# Altium PCB Monitor_Board_Model_H201.PcbDoc (part 5 of 5)
Units mm, origin at the board's own origin, x right, y up, seen from the top; angles counter-clockwise.
Board outline 50 x 40 mm, 6 copper layers (1-SIG-TOP, 2-GND, 3-PWR, 4-SIG-HOR, 5-SIG-VERT, 6-GND-BOT), stack 1.17 mm thick; 210 components, 140 nets, 699 pads, 51 vias.
Unrouted connection lines stored in the file: 491.
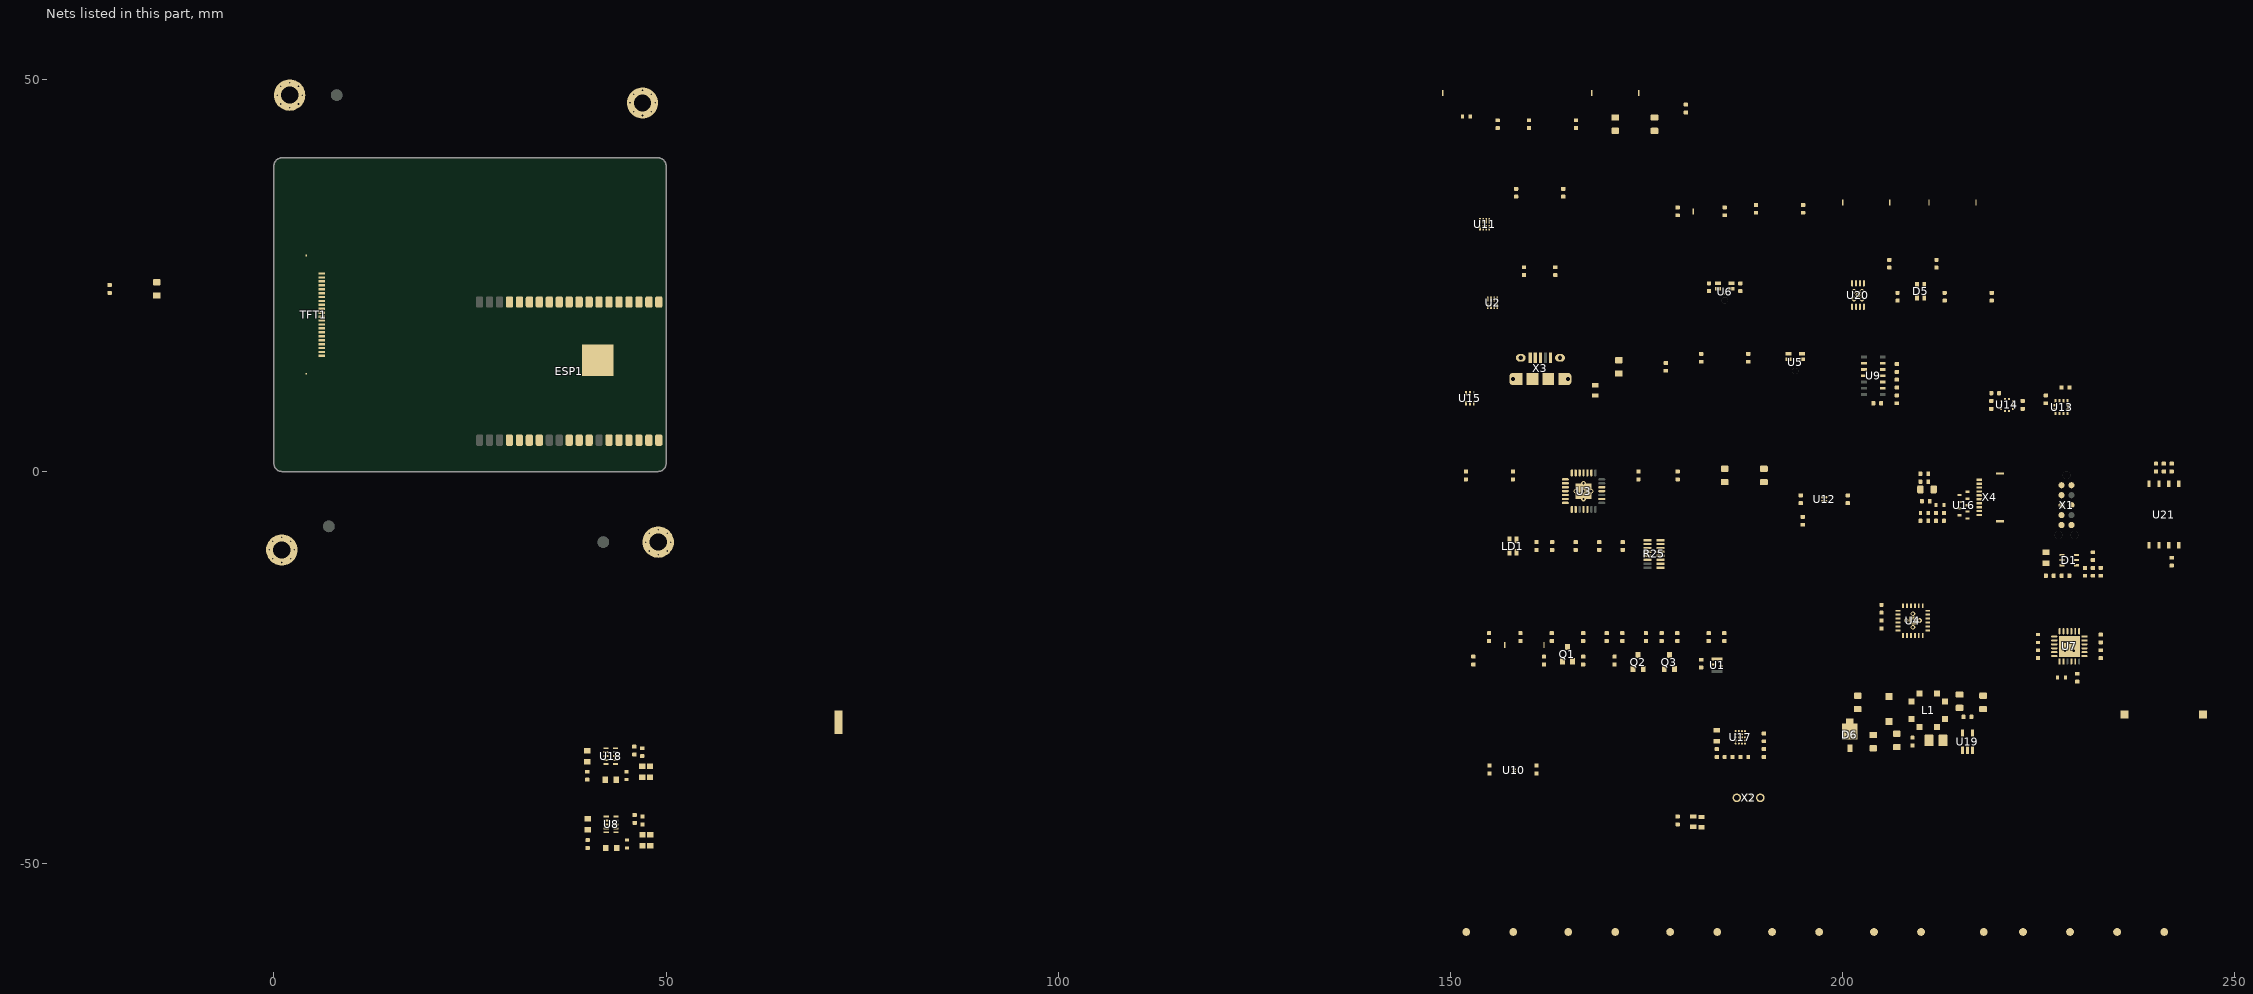
[diagram p7: the nets of this part, all layers, seen from the top]

## Via types
v1: diameter 0.55, hole 0.2, 1-SIG-TOP to 6-GND-BOT, 32 vias
v2: diameter 0.605, hole 0.3, 1-SIG-TOP to 6-GND-BOT, tented both sides, 15 vias
v3: diameter 0.6, hole 0.3, 1-SIG-TOP to 6-GND-BOT, tented both sides, 4 vias

## Nets (pads, with @x,y where several pads share a name; then routed paths per layer and width w, separated by ;. In a path a pad name is that pad's centre, name@x,y a point inside that pad or via, vN(x,y) a via of type N, cw(c..) or ccw(c..) an arc to the next point about the centre after c; other vN are vias at no path point)
1V8_HRM_PS: C29.1 C30.1 C33.2 C34.1 NT10.2 R37.2 R38.2 R39.1 U9.11 U10.A2 U11.1 U12.B2
1V8_VDD: C49.2 R40.2 U17.D1
3V3_ESP32: C2.2 C4.2 C5.2 C6.2 C9.2 C14.1 C15.1 C16.2 C17.2 C18.2 C47.1 C52.2 C53.1 C54.1 ESP1.2 NT3.1 R7.2 R8.2 R16.1 R50.2 TP5.1 U1.4 U2.8 U4.21 U5.2 U6.2 U7.7 U7.8 U17.E1 U17.E4 U18.5 U18.6 U18.7
+3V3: C7.2 C8.1 C32.2 C35.2 C36.1 C38.2 C39.1 C40.2 C48.1 C60.1 C61.1 C62.2 C63.2 C64.2 FB1.1 NT2.2 NT6.1 NT8.2 R13.2 R14.2 R58.1 R59.1 R60.1 TFT1.3 TFT1.4 TFT1.6 TP6.1 U2.1 U10.A1 U11.8 U12.A2 U13.3 U13.7 U14.1 U17.D4 U20.8 U21.8 X1.1
\CP2102_RST: R24.1 U3.9
\ESP32_RST: C3.2 ESP1.3 R15.1 R16.2
\MR: U16.5 U17.C1 X4.8
\RESET: Q1.3 R1.2 R15.2 R21.2 U4.24
\RST: R1.1
\SUSP_B: R29.1 U3.11
A0: NT1.2 U4.18 U4.23
ADCIN: C44.2 R40.1 R41.1 R42.1 R43.1 R44.1 R45.1 R46.1 R47.1 U17.C4
DCD: R25.3 U3.1
DIO_0: U4.1 U10.B1
DIO_1: R61.2 U4.2
DIO_2: U4.3 U9.13
DIO_3: R62.2 U4.4
DIO_4: U4.5 U14.7
DIO_5: U4.6 U13.5
DIO_6: U4.7 U17.C2
DIO_7: U4.8 U17.D3
DIO_8: TFT1.20 U4.10
DIO_9: R34.1 U4.11 U8.3
DIO_10: U4.12 U7.9
DIO_11: U4.13 U7.18
DIO_12: R9.1 U4.14
DIO_13: R10.1 U4.15
DIO_14: R11.1 U4.16
DIO_15: R12.1 U4.17
DISP.TE: TFT1.19
DSR: R25.6 U3.27
DTR: Q2.2 Q3.2 R2.1 U3.28
GND: C1.2 C2.1 C3.1 C4.1 C5.1 C6.1 C7.1 C8.2 C9.1 C10.1 C11.1 C12.1 C13.1 C14.2 C15.2 C16.1 C17.1 C18.1 C19.1 C20.1 C21.1 C22.1 C23.2 C24.2 C26.2 C27.2 C28.1 C29.2 C30.2 C31.1 C32.1 C33.1 C34.2 C35.1 C36.2 C37.2 C38.1 C39.2 C40.1 C41.2 C42.1 C43.1 C44.1 C45.1 C46.2 C47.2 C48.2 C49.1 C50.2 C51.2 C53.2 C54.2 C55.1 C56.2 C58.1 C59.2 C60.2 C61.2 C62.1 C63.1 C64.1 D1.2 D2.2 D3.2 D4.2 ESP1.1 ESP1.15 ESP1.38 ESP1.39 J1.1 L1.1 MNT1.1 MNT2.1 MNT3.1 MNT4.1 NT1.1 NT4.1 NT5.1 NT7.2 NT9.2 R9.2 R10.2 R11.2 R12.2 R22.1 R26.1 R33.2 R34.2 R36.2 R39.2 R48.1 R49.2 R51.2 R55.1 R61.1 R62.1 TFT1.5 TFT1.7 TFT1.8 TFT1.9 TFT1.10 TFT1.11 TFT1.12 TFT1.13 TFT1.14 TFT1.15 TFT1.22 TFT1.23 TFT1.24 TP9.1 TP10.1 TP11.1 TP12.1 TP13.1 TP14.1 TP15.1 U1.2 U2.4 U3.3 U3.29 U4.9 U4.EP U5.5 U6.5 U7.24 U7.25 U8.9 U8.10 U9.4 U9.12 U10.B2 U11.4 U12.B1 U13.4 U13.8 U13.9 U14.3 U14.8 U14.9 U15.3 U16.3 U17.A4 U17.C3 U18.9 U18.10 U19.2 U20.5 U20.9 U21.4 X1.3 X2.3 X3.5 X3.6 X4.9 X4.10 X4.S1 X4.S2
  other v1: 1,-11.6 -0.131,-11.131 2.131,-11.131 49,-10.6 47.869,-10.131 50.131,-10.131 -0.6,-10 2.6,-10 47.4,-9 50.6,-9 -0.131,-8.869 2.131,-8.869 1,-8.4 47.869,-7.869 50.131,-7.869 49,-7.4 47,45.4 45.869,45.869 48.131,45.869 2,46.4 0.869,46.869 3.131,46.869 45.4,47 48.6,47 0.4,48 3.6,48 45.869,48.131 48.131,48.131 47,48.6 0.869,49.131 3.131,49.131 2,49.6
  other v2: 209,-19.85 208.15,-19 209,-19 209.85,-19 209,-18.15 167,-3.5 166,-2.5 167,-2.5 168,-2.5 167,-1.5 201.5,22 202.5,22 202,22.5 201.5,23 202.5,23
  other v3: 228.405,-22.84 229.505,-22.84 228.405,-21.74 229.505,-21.74
GPIO0: ESP1.25 R5.1 U7.12
GPIO1: ESP1.35 R25.4 U3.25
GPIO2: ESP1.24 R6.1 R7.1 TP3.1 U2.7 U4.19 U17.E3
GPIO3: ESP1.34 R26.2 U3.26
GPIO4: ESP1.26 R8.1 TP4.1 U2.6 U4.20 U17.E2
GPIO5: ESP1.29 R58.2 U21.1
GPIO12: ESP1.14 R20.2
GPIO13: ESP1.16 R18.2
GPIO14: ESP1.13 R17.2
GPIO15: ESP1.23 R19.2
GPIO18: ESP1.30 TFT1.17 U21.6
GPIO19: ESP1.31 U21.2
GPIO21: ESP1.33 U7.16
GPIO22: ESP1.36 U7.13
GPIO23: ESP1.37 R57.1 U21.5
GPIO25: ESP1.10 TFT1.18
GPIO26: ESP1.11 TFT1.16
GPIO27: ESP1.12 U7.14
GPIO32: C1.1 ESP1.8
GPIO33: ESP1.9 U1.3
GPIO34: ESP1.6 U17.D2
GPIO35: ESP1.7 U17.B1
GPIO36: ESP1.4 U7.15
GPIO39: ESP1.5 U4.22
I2C.SCL: R13.1 TP1.1 U2.2 U7.19 U11.7 U13.12 U14.2 U20.6
I2C.SDA: R14.1 TP2.1 U2.3 U7.20 U11.6 U13.2 U14.4 U20.7
KEY_1: R41.2 U16.1 X4.1
KEY_2: R42.2 U16.9 X4.2
KEY_3: R43.2 U16.2 X4.3
KEY_4: R44.2 U16.8 X4.4
KEY_5: R45.2 U16.7 X4.5
KEY_6: R46.2 U16.4 X4.6
KEY_7: R47.2 U16.6 X4.7
LCD_BL_A: C58.2 C59.1 D6.1 D7.1 R56.1 TFT1.1
LCD_BL_K: D7.2 R55.2 R56.2 TFT1.2 U19.3
LCD_BL_PWM: U19.4 U20.4
LR_SEL1: NT3.2 U5.4
LR_SEL2: NT4.2 U6.4
MICCLK: R30.2 U7.10
MICDO: R31.1 R32.1 U7.11
NetC19_2: C19.2 R33.1 U7.5
NetC20_2: C20.2 C22.2 U7.4
NetC25_1: C25.1 R35.1 R36.1 U8.8
NetC28_2: C28.2 C31.2 C37.1 U9.9 U9.10 U12.A1
NetC41_1: C41.1 FB1.2 U14.10
NetC52_1: C52.1 R50.1 R51.1 U18.8
NetC55_2: C55.2 C56.1 FB2.2 L1.4 U19.5
NetC57_1: C57.1 L1.3 U19.1
NetC57_2: C57.2 D6.2 L1.2
NetD1_1: D1.1 R18.1 X1.4
NetD1_3: D1.3 R17.1 X1.2
NetD1_4: D1.4 R21.1 X1.10
NetD1_5: D1.5 R20.1 X1.8
NetD1_6: D1.6 R19.1 X1.6
NetD2_1: D2.1 U17.A3 U17.B3 X2.1
NetD3_1: D3.1 R48.2 U17.B4 X2.2
NetD5_BK: D5.BK R52.2
NetD5_GK: D5.GK R53.2
NetD5_RK: D5.RK R54.2
NetJ1_2: J1.2 X1.5
NetLD1_BK: LD1.BK R29.2
NetLD1_GK: LD1.GK R28.2
NetLD1_RK: LD1.RK R27.2
NetNT2_1: NT2.1 U2.5
NetNT5_2: NT5.2 U7.17 U7.21 U7.22
NetNT6_2: NT6.2 U14.6
NetNT7_1: NT7.1 U14.5
NetNT8_1: NT8.1 U13.11
NetNT9_1: NT9.1 U13.1
NetNT10_1: NT10.1 U11.5
NetNT11_1: NT11.1 R49.1 U18.3
NetQ1_1: Q1.1 R2.2
NetQ2_1: Q2.1 R3.2
NetQ2_3: Q2.3 R5.2
NetQ3_1: Q3.1 R4.2
NetQ3_3: Q3.3 R6.2
NetR22_2: R22.2 R23.2 U3.8
NetR30_1: R30.1 U5.3 U6.3
NetR31_2: R31.2 U5.1
NetR32_2: R32.2 U6.1
NetR37_1: R37.1 U9.3 U11.3
NetR38_1: R38.1 U9.2 U11.2
NetR52_1: R52.1 U20.1
NetR53_1: R53.1 U20.2
NetR54_1: R54.1 U20.3
NetR57_2: R57.2 TFT1.21
NetU7_1: U7.1 Y1.M
NetU7_23: U7.23 Y1.P
NetU13_6: U13.6
NetU13_10: U13.10
QSPI.IO2/WP: R59.2 U21.3
QSPI.IO3/HD: R60.2 U21.7
RI/CLK: R25.2 U3.2
RXT: R28.1 U3.18
SUSP: U3.12
TXT: R27.1 U3.19
UART0.CTS: R25.5 U3.23
UART0.RTS: Q1.2 R3.1 R4.1 U3.24
USB.D_N: U3.5 U15.2
USB.D_P: U3.4 U15.1
USB_CONN_N: U15.5 X3.2
USB_CONN_P: U15.6 X3.3
VBUS: C12.2 C13.2 C42.2 C43.2 C45.2 D4.1 LD1.A R23.1 TP8.1 U3.7 U17.A1 X3.1
VDD: C10.2 C11.2 R24.2 R25.9 R25.10 R25.11 R25.12 R25.13 R25.14 R25.15 R25.16 U3.6
VDD_PA: C21.2 C25.2 C26.1 C27.1 R35.2 U7.2 U8.5 U8.6 U8.7
VSYS: C23.1 C24.1 C46.1 C50.1 C51.1 D5.A FB2.1 NT11.2 TP7.1 U8.1 U8.2 U17.A2 U17.B2 U18.1 U18.2
WKUP: R25.1 U3.16
pads on no net: ESP1.17 ESP1.18 ESP1.19 ESP1.20 ESP1.21 ESP1.22 ESP1.27 ESP1.28 ESP1.32 FID1. FID2. FID3. R25.7 R25.8 U1.1 U3.10 U3.13 U3.14 U3.15 U3.17 U3.20 U3.21 U3.22 U5. U6. U7.3 U7.6 U8.4 U9.1 U9.5 U9.6 U9.7 U9.8 U9.14 U15.4 U18.4 X1.0 X1.7 X1.9 X3.4

## Polygon pours and split planes (outlines as drawn)
GND on 1-SIG-TOP "NONET_L01_P112" (solid, shelved, pour order 112): -25,53 75,53 75,-17 -25,-17
no net on 1-SIG-TOP "NONET_L01_P110" (solid, shelved, pour order 110): -0.616,-9.126 4.337,-9.126 4.337,-12.301 -0.616,-12.301
no net on 1-SIG-TOP "NONET_L01_P108" (solid, shelved, pour order 108): 3.575,-4.3 6.115,-4.3 6.115,2.431 6.75,2.431 6.75,5.86 4.464,5.86 4.464,8.4 -0.87,8.4 -0.87,-1.76 3.575,-1.76
VBUS on 1-SIG-TOP "NONET_L01_P107" (solid, shelved, pour order 107): -20.555,-4.046 -17.126,-4.046 -17.126,-6.459 -18.904,-6.459 -18.904,-6.713 -20.555,-6.713
no net on 1-SIG-TOP "NONET_L01_P106" (solid, shelved, pour order 106): -14.459,-7.983 -12.935,-7.983 -12.935,-9.507 -9.76,-9.507 -9.76,-13.317 -13.824,-13.317 -13.824,-8.872 -14.459,-8.872
VSYS on 1-SIG-TOP "NONET_L01_P105" (solid, shelved, pour order 105): 13.227,-6.586 13.227,-10.65 11.195,-10.65 11.195,-6.586
VSYS on 1-SIG-TOP "NONET_L01_P104" (solid, shelved, pour order 104): 5.607,18.56 5.607,16.02 1.035,16.02 1.035,18.56
VSYS on 1-SIG-TOP "NONET_L01_P103" (solid, shelved, pour order 103): 60.09,17.29 62.63,17.29 62.63,15.385 60.09,15.385
VSYS on 1-SIG-TOP "NONET_L01_P102" (solid, shelved, pour order 102): -14.459,-6.967 -10.395,-6.967 -10.395,-3.03 -7.982,-3.03 -7.982,-10.015 -9.76,-10.015 -9.76,-9.38 -12.808,-9.38 -12.808,-7.856 -14.459,-7.856
VSYS on 1-SIG-TOP "NONET_L01_P101" (solid, shelved, pour order 101): 70.123,13.861 70.123,11.829 72.155,11.829 72.155,13.861
VSYS on 1-SIG-TOP "NONET_L01_P100" (solid, shelved, pour order 100): 69.996,18.433 70.504,18.433 70.504,20.592 72.536,20.592 72.536,14.877 69.996,14.877
LCD_BL_A on 1-SIG-TOP "NONET_L01_P097" (solid, shelved, pour order 97): 60.852,9.289 60.852,13.48 56.915,13.48 56.915,9.289
no net on 1-SIG-TOP "NONET_L01_P096" (solid, shelved, pour order 96): 28.975,-6.332 34.69,-6.332 34.69,-8.11 30.245,-8.11 30.245,-8.87 28.975,-8.87
no net on 1-SIG-TOP "NONET_L01_P095" (solid, shelved, pour order 95): 20.72,-6.332 26.435,-6.332 26.435,-8.87 25.165,-8.87 25.165,-8.11 20.72,-8.11
no net on 1-SIG-TOP "NONET_L01_P094" (solid, shelved, pour order 94): 13.608,5.606 8.401,5.606 8.401,2.05 11.195,2.05 11.195,-2.014 13.608,-2.014
no net on 1-SIG-TOP "NONET_L01_P093" (solid, shelved, pour order 93): 13.608,7.638 15.64,7.638 15.64,1.415 16.021,1.415 16.021,-2.014 13.608,-2.014
no net on 1-SIG-TOP "NONET_L01_P092" (solid, shelved, pour order 92): 61.36,7.13 61.36,5.098 63.9,5.098 63.9,8.4 62.249,10.051 60.979,10.051 60.979,9.035 58.185,9.035 58.185,7.13
no net on 1-SIG-TOP "NONET_L01_P091" (solid, shelved, pour order 91): 63.9,5.098 66.059,5.098 66.059,8.273 68.218,8.273 68.218,10.178 65.678,10.178 63.9,8.4
no net on 1-SIG-TOP "NONET_L01_P090" (solid, shelved, pour order 90): 63.9,14.75 63.9,12.21 65.805,10.305 68.599,10.305 68.599,11.956 69.742,11.956 69.742,13.861 68.726,13.861 68.726,13.607 65.297,13.607 65.297,14.75
no net on 1-SIG-TOP "NONET_L01_P089" (solid, shelved, pour order 89): 60.598,20.592 70.377,20.592 70.377,18.56 67.964,18.56 67.964,16.909 66.44,16.909 66.44,17.925 62.503,17.925 62.503,17.417 60.598,17.417
no net on 1-SIG-TOP "NONET_L01_P088" (solid, shelved, pour order 88): 67.075,16.401 68.218,16.401 68.218,14.877 69.869,14.877 69.869,18.433 68.218,18.433 68.218,16.909 67.075,16.909
no net on 1-SIG-TOP "NONET_L01_P087" (solid, shelved, pour order 87): 67.075,31.514 70.631,31.514 70.631,26.815 67.075,26.815
no net on 1-SIG-TOP "NONET_L01_P086" (solid, shelved, pour order 86): 61.233,26.434 61.233,24.275 64.535,24.275 64.535,28.085 63.265,28.085 63.265,26.434
NetC25_1 on 1-SIG-TOP "NONET_L01_P085" (solid, shelved, pour order 85): 67.075,31.514 70.631,31.514 70.631,35.578 67.075,35.578
NetC25_1 on 1-SIG-TOP "NONET_L01_P084" (solid, shelved, pour order 84): 56.407,43.96 58.566,43.96 58.566,46.373 60.344,46.373 60.344,47.77 56.407,47.77
no net on 1-SIG-TOP "NONET_L01_P083" (solid, shelved, pour order 83): -15.729,-5.824 -12.808,-5.824 -12.808,-6.713 -10.522,-6.713 -10.522,-3.284 -15.729,-3.284
no net on 1-SIG-TOP "NONET_L01_P082" (solid, shelved, pour order 82): 20.085,51.58 25.165,51.58 25.165,49.04 20.085,49.04
VDD on 1-SIG-TOP "NONET_L01_P081" (solid, shelved, pour order 81): 6.75,22.624 6.75,19.068 10.941,19.068 10.941,22.624
VDD on 1-SIG-TOP "NONET_L01_P080" (solid, shelved, pour order 80): 26.435,50.945 29.229,50.945 29.229,48.786 26.435,48.786
LCD_BL_K on 1-SIG-TOP "NONET_L01_P099" (solid, shelved, pour order 99): 55.645,8.4 55.645,7.13 56.915,7.13 56.915,8.4
LCD_BL_K on 1-SIG-TOP "NONET_L01_P098" (solid, shelved, pour order 98): 70.25,8.4 70.25,7.13 71.52,7.13 71.52,8.4
GND on 4-SIG-HOR "NONET_L04_P118" (solid, shelved, pour order 118): -25,53 75,53 75,-17 -25,-17
LCD_BL_K on 4-SIG-HOR "NONET_L04_P114" (solid, shelved, pour order 114): 70.25,8.4 70.25,7.13 71.52,7.13 71.52,8.4
LCD_BL_K on 4-SIG-HOR "NONET_L04_P116" (solid, shelved, pour order 116): 55.645,8.4 55.645,7.13 56.915,7.13 56.915,8.4
LCD_BL_A on 4-SIG-HOR "NONET_L04_P117" (solid, shelved, pour order 117): 57.55,27.45 58.82,27.45 58.82,26.18 57.55,26.18
GND on 6-GND-BOT "NONET_L06_P131" (solid, shelved, pour order 131): -25,53 75,53 75,-17 -25,-17
VSYS on 6-GND-BOT "NONET_L06_P129" (solid, shelved, pour order 129): 28.975,-8.745 28.975,-11.92 26.435,-11.92 26.435,-8.745
no net on 6-GND-BOT "NONET_L06_P125" (solid, shelved, pour order 125): 28.975,-7.475 30.245,-7.475 30.245,-8.87 28.975,-8.87
no net on 6-GND-BOT "NONET_L06_P127" (solid, shelved, pour order 127): 25.165,-7.475 26.435,-7.475 26.435,-8.87 25.165,-8.87
GND on 5-SIG-VERT "NONET_L05_P123" (solid, shelved, pour order 123): -25,53 75,53 75,-17 -25,-17
LCD_BL_A on 5-SIG-VERT "NONET_L05_P119" (solid, shelved, pour order 119): 58.185,9.289 58.185,13.48 56.915,13.48 56.915,9.289
LCD_BL_A on 5-SIG-VERT "NONET_L05_P121" (solid, shelved, pour order 121): 57.55,27.45 58.82,27.45 58.82,26.18 57.55,26.18
GND on 2-GND (split plane): 49.096,39.482 49.188,39.454 49.273,39.409 49.348,39.348 49.409,39.273 49.454,39.188 49.482,39.096 49.491,39.012 49.49,39 49.49,1 49.491,0.988 49.482,0.904 49.454,0.812 49.409,0.727 49.348,0.652 49.273,0.591 49.188,0.546 49.096,0.518 49.012,0.509 49,0.51 1,0.51 0.988,0.509 0.904,0.518 0.812,0.546 0.727,0.591 0.652,0.652 0.591,0.727 0.546,0.812 0.518,0.904 0.509,0.988 0.51,1 0.51,39 0.509,39.012 0.518,39.096 0.546,39.188 0.591,39.273 0.652,39.348 0.727,39.409 0.812,39.454 0.904,39.482 0.988,39.491 1,39.49 49,39.49 49.012,39.491
+3V3 on 3-PWR (split plane): 49.096,39.482 49.188,39.454 49.273,39.409 49.348,39.348 49.409,39.273 49.454,39.188 49.482,39.096 49.491,39.012 49.49,39 49.49,1 49.491,0.988 49.482,0.904 49.454,0.812 49.409,0.727 49.348,0.652 49.273,0.591 49.188,0.546 49.096,0.518 49.012,0.509 49,0.51 1,0.51 0.988,0.509 0.904,0.518 0.812,0.546 0.727,0.591 0.652,0.652 0.591,0.727 0.546,0.812 0.518,0.904 0.509,0.988 0.51,1 0.51,39 0.509,39.012 0.518,39.096 0.546,39.188 0.591,39.273 0.652,39.348 0.727,39.409 0.812,39.454 0.904,39.482 0.988,39.491 1,39.49 49,39.49 49.012,39.491

## Keep-outs
Keep-Out Layer:
  text "'.Layer_Name'" at 95,-4.5 h2.5

## Other copper
1-SIG-TOP:
  text "'.Layer_Name'" at 95,50.5 h2.5
4-SIG-HOR:
  text "'.Layer_Name'" at 95,43 h2.5
5-SIG-VERT:
  text "'.Layer_Name'" at 95,40.5 h2.5
6-GND-BOT:
  text "'.Layer_Name'" at 110,38 h2.5
2-GND (plane layer: these items are gaps in the copper):
  text "'.Layer_Name'" at 95,48 h2.5
3-PWR (plane layer: these items are gaps in the copper):
  text "'.Layer_Name'" at 95,45.5 h2.5

## Silkscreen, mask and mechanical layers (free items; w line width, h text height)
Top Overlay:
  text "'.Layer_Name'" at 95,13 h2.5
Bottom Overlay:
  text "'.Layer_Name'" at 110,10.5 h2.5
Top Paste:
  text "'.Layer_Name'" at 95,8 h2.5
Bottom Paste:
  text "'.Layer_Name'" at 110,5.5 h2.5
Top Solder:
  text "'.Layer_Name'" at 95,3 h2.5
Bottom Solder:
  text "'.Layer_Name'" at 110,0.5 h2.5
Drill Guide:
  text "'.Layer_Name'" at 95,-2 h2.5
Dimensions:
  text "'.Layer_Name'" at 95,35.5 h2.5
Fiducials:
  text "'.Layer_Name'" at 95,33 h2.5
Outline:
  the board outline again, w1
  text "'.Layer_Name'" at 95,30.5 h2.5
3D Body TOP:
  text "'.Layer_Name'" at 95,28 h2.5
TOP ASSY:
  text "'.Layer_Name'" at 95,25.5 h2.5
Courtyard TOP:
  text "'.Layer_Name'" at 95,23 h2.5
PCB Sheet:
  lines w0.7: -60.88,-220.2 -60.88,76.8 ; -60.88,-145.95 -55.88,-145.95 ; -60.88,-71.7 -55.88,-71.7 ; -60.88,2.55 -55.88,2.55 ; -55.88,-184.513 9.727,-184.513 47.827,-184.513 124.12,-184.513 ; -55.88,71.8 124.12,71.8 124.12,-215.2 -55.88,-215.2 -55.88,71.8 ; -17.773,-215.2 -17.773,-184.513 ; -17.773,-207.373 124.12,-207.373 ; -17.773,-199.753 124.12,-199.753 ; -17.773,-192.133 124.12,-192.133 ; 4.19,-220.2 4.19,-215.2 ; 4.19,71.8 4.19,76.8 ; 37.667,-215.2 37.667,-199.753 37.667,-184.513 ; 64.12,-220.2 64.12,-215.2 ; 64.12,71.8 64.12,76.8 ; 91.007,-215.2 91.007,-199.753 ; 124.12,-145.95 129.12,-145.95 ; 124.12,-71.7 129.12,-71.7 ; 124.12,2.55 129.12,2.55 ; -80.88,-220.2 129.12,-220.2 129.12,76.8 -80.88,76.8 -80.88,-220.2
  text "1" at -25.88,73.3 h1.78
  text "2" at 34.12,73.3 h1.78
  text "3" at 94.12,73.3 h1.78
  text "A" at -58.88,37.175 h1.78
  text "A" at 126.12,37.175 h1.78
  text "'.Layer_Name'" at 95,20.5 h2.5
  text "B" at -58.88,-37.075 h1.78
  text "B" at 126.12,-37.075 h1.78
  text "C" at -58.88,-111.325 h1.78
  text "C" at 126.12,-111.325 h1.78
  text "D" at -58.88,-183.575 h1.78
  text "D" at 126.12,-183.575 h1.78
  text "ENGINEER:" at -16.503,-187.053 h1.14
  text "PROJECT NAME:" at 38.937,-187.053 h1.14
  text "'.ProjectName'" at 52.71,-190.2 h3
  text "'._HWEngineer'" at -14.091,-190.445 h1.52
  text "ACME CPU" at -50.88,-191.2 h5
  text "PCB DESIGNER:" at -16.503,-194.546 h1.14
  text "BOARD NAME:" at 38.937,-194.553 h1.14
  text "'._CompanyName'" at -50.88,-196.2 h1.78
  text "'._BoardName'" at 52.71,-197.95 h3
  text "'._HWEngineer'" at -14.218,-198.192 h1.52
  text "'._address1'" at -50.88,-201.2 h1.78
  text "DATE:" at -16.503,-202.293 h1.14
  text "PART NO.:" at 38.937,-202.293 h1.14
  text "Ver:" at 92.277,-202.293 h1.14
  text "'._address2'" at -50.88,-203.7 h1.78
  text "'._Revision'" at 101.365,-204.96 h3
  text "'._DocumentDate'" at -14.218,-205.05 h1.78
  text "'._PCBModel'" at 52.71,-205.7 h3
  text "'._address3'" at -50.88,-206.2 h1.27
  text "'._address4'" at -50.88,-208.7 h1.27
  text "FILE NAME:" at -16.503,-209.913 h1.14
  text "SCH. NO.:" at 38.937,-209.913 h1.14
  text "SCALE:" at 92.277,-209.913 h1.14
  text "A4 M1:1" at 102,-212.58 h3
  text "'.ProjectNumber'" at 52.71,-213.2 h3
  text "'.Pcb_File_Name_No_Path'" at -14.154,-213.339 h1.78
  text "1" at -25.88,-218.7 h1.78
  text "2" at 34.12,-218.7 h1.78
  text "3" at 94.12,-218.7 h1.78
Drill Drawing:
  text "'.Layer_Name'" at 95,-7 h2.5
  text ".Legend" at -55,-177 h3.5
Courtyard BOT:
  text "'.Layer_Name'" at 110,18 h2.5
BOT ASSY:
  text "'.Layer_Name'" at 110,15.5 h2.5
Layer Stack:
  drawing of 610 lines, arcs and shapes, not listed
  text "'.Layer_Name'" at 95,-9.5 h2.5
  text "Layer" at -26.285,-42.866 h1.52
  text "Name" at -15.874,-42.866 h1.52
  text "Material" at 7.742,-42.866 h1.52
  text "Thickness" at 29.58,-42.866 h1.52
  text "Constant" at 46.086,-42.866 h1.52
  text "Board Layer Stack" at 60.56,-42.866 h1.52
  text "1" at -26.285,-45.914 h1.52
  text "Top Overlay" at -15.874,-45.914 h1.52
  text "2" at -26.285,-48.962 h1.52
  text "Top Solder" at -15.874,-48.962 h1.52
  text "Solder Resist" at 7.742,-48.962 h1.52
  text "0.020mm" at 29.58,-48.962 h1.52
  text "3.5" at 46.086,-48.962 h1.52
  text "3" at -26.285,-52.01 h1.52
  text "1-SIG-TOP" at -15.874,-52.01 h1.52
  text "Copper" at 7.742,-52.01 h1.52
  text "0.035mm" at 29.58,-52.01 h1.52
  text "4" at -26.285,-55.058 h1.52
  text "Dielectric 1" at -15.874,-55.058 h1.52
  text "FR-4" at 7.742,-55.058 h1.52
  text "0.105mm" at 29.58,-55.058 h1.52
  text "4.29" at 46.086,-55.058 h1.52
  text "5" at -26.285,-58.106 h1.52
  text "2-GND" at -15.874,-58.106 h1.52
  text "Copper" at 7.742,-58.106 h1.52
  text "0.035mm" at 29.58,-58.106 h1.52
  text "6" at -26.285,-61.154 h1.52
  text "Dielectric 3" at -15.874,-61.154 h1.52
  text "FR-4" at 7.742,-61.154 h1.52
  text "0.300mm" at 29.58,-61.154 h1.52
  text "3.96" at 46.086,-61.154 h1.52
  text "7" at -26.285,-64.202 h1.52
  text "3-PWR" at -15.874,-64.202 h1.52
  text "Copper" at 7.742,-64.202 h1.52
  text "0.035mm" at 29.58,-64.202 h1.52
  text "8" at -26.285,-67.25 h1.52
  text "Dielectric 2" at -15.874,-67.25 h1.52
  text "FR-4" at 7.742,-67.25 h1.52
  text "0.150mm" at 29.58,-67.25 h1.52
  text "4.29" at 46.086,-67.25 h1.52
  text "9" at -26.285,-70.298 h1.52
  text "4-SIG-HOR" at -15.874,-70.298 h1.52
  text "Copper" at 7.742,-70.298 h1.52
  text "0.035mm" at 29.58,-70.298 h1.52
  text "10" at -26.285,-73.346 h1.52
  text "Dielectric 4" at -15.874,-73.346 h1.52
  text "FR-4" at 7.742,-73.346 h1.52
  text "0.300mm" at 29.58,-73.346 h1.52
  text "3.96" at 46.086,-73.346 h1.52
  text "11" at -26.285,-76.394 h1.52
  text "5-SIG-VERT" at -15.874,-76.394 h1.52
  text "Copper" at 7.742,-76.394 h1.52
  text "0.035mm" at 29.58,-76.394 h1.52
  text "12" at -26.285,-79.442 h1.52
  text "Dielectric 5" at -15.874,-79.442 h1.52
  text "FR-4" at 7.742,-79.442 h1.52
  text "0.105mm" at 29.58,-79.442 h1.52
  text "4.29" at 46.086,-79.442 h1.52
  text "13" at -26.285,-82.49 h1.52
  text "6-GND-BOT" at -15.874,-82.49 h1.52
  text "Copper" at 7.742,-82.49 h1.52
  text "0.035mm" at 29.58,-82.49 h1.52
  text "14" at -26.285,-85.538 h1.52
  text "Bottom Solder" at -15.874,-85.538 h1.52
  text "Solder Resist" at 7.742,-85.538 h1.52
  text "0.020mm" at 29.58,-85.538 h1.52
  text "3.5" at 46.086,-85.538 h1.52
  text "15" at -26.285,-88.586 h1.52
  text "Bottom Overlay" at -15.874,-88.586 h1.52

## Dimensions
1,39 to -3.43,43.43 on Dimensions

## Text inside footprints (layer, text, board x,y; h text height)
D5: TOP ASSY "A" at 209.8,21.7 h0.5 r90
Ground&PowerPlanes_1: 1-SIG-TOP "1" at 98.004,-20.524 h2
Ground&PowerPlanes_2: 2-GND "2" at 100.154,-20.524 h2; 2-GND "2" at 100.154,-20.524 h2
Ground&PowerPlanes_3: 3-PWR "3" at 102.432,-20.522 h2; 3-PWR "3" at 102.432,-20.522 h2
Ground&PowerPlanes_4: 4-SIG-HOR "4" at 104.572,-20.524 h2
Ground&PowerPlanes_5: 5-SIG-VERT "5" at 106.858,-20.524 h2
Ground&PowerPlanes_6: 6-GND-BOT "6" at 109.144,-20.524 h2
LD1: TOP ASSY "A" at 157.8,-10.8 h0.5 r90
Logo1: Top Overlay "CPU" at 66.545,41.29 h2.5 r90; Top Overlay "Acme" at 62.945,36.29 h2.5 r90
TFT1: TOP ASSY "1" at 4.465,14.92 h1 r270; TOP ASSY "22" at 4.465,25.969 h1 r270; BOT ASSY "Center of the panel" at 24.7,10.9 h1 r270; BOT ASSY "Center of the screen" at 28.7,11.1 h1 r270; BOT ASSY "Top Left Corner" at 46.9,5.2 h1 r270
X1: TOP ASSY "10" at 228.89,-1.99 h0.5; TOP ASSY "1" at 227.89,-1.99 h0.5; TOP ASSY "9" at 229.09,-3.29 h0.5; TOP ASSY "2" at 227.79,-3.29 h0.5; TOP ASSY "8" at 229.09,-4.49 h0.5; TOP ASSY "3" at 227.79,-4.49 h0.5; TOP ASSY "7" at 229.09,-5.79 h0.5; TOP ASSY "4" at 227.69,-5.79 h0.5; TOP ASSY "5" at 227.79,-7.09 h0.5; TOP ASSY "6" at 229.09,-6.99 h0.5
X2: TOP ASSY "3" at 189.245,-42.21 h1.02; TOP ASSY "2" at 187.745,-42.21 h1.02; TOP ASSY "1" at 186.545,-42.21 h1.02
Y1: Top Overlay "+" at 245.6,-33.2 h1.27; Top Overlay "-" at 235.6,-33.2 h1.27